# EAGLE board base_circuit (EAGLE 7.5.0)
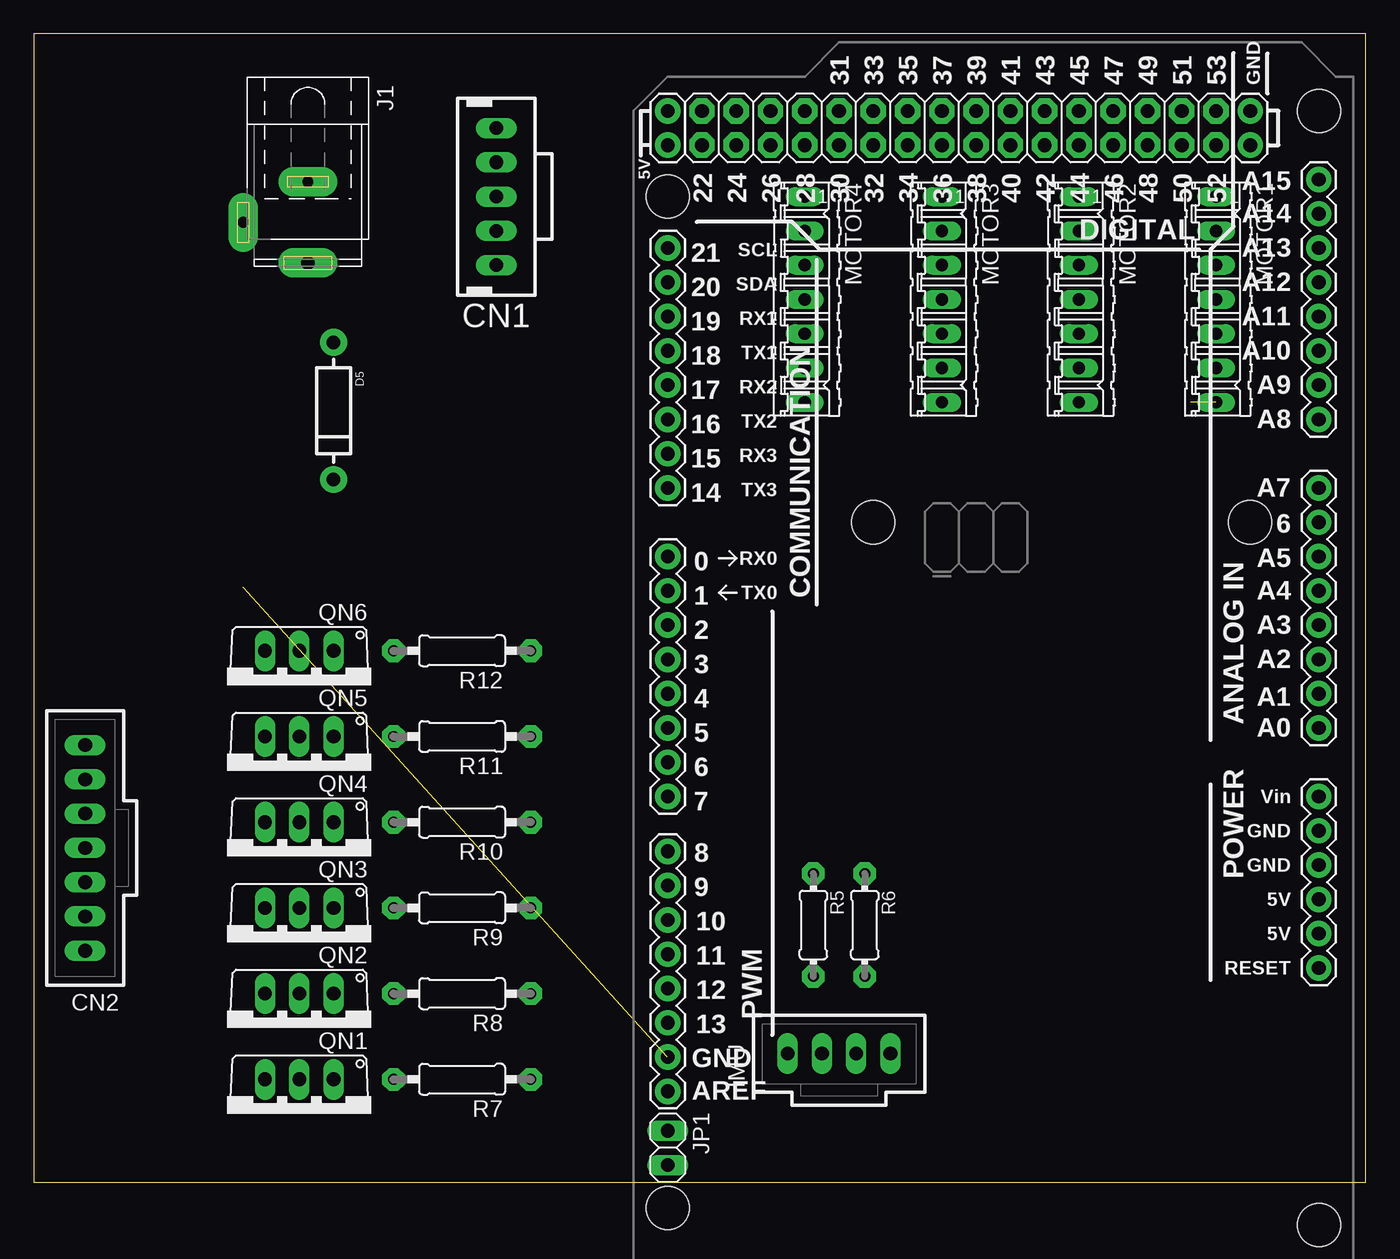
[diagram p0: board, top side]
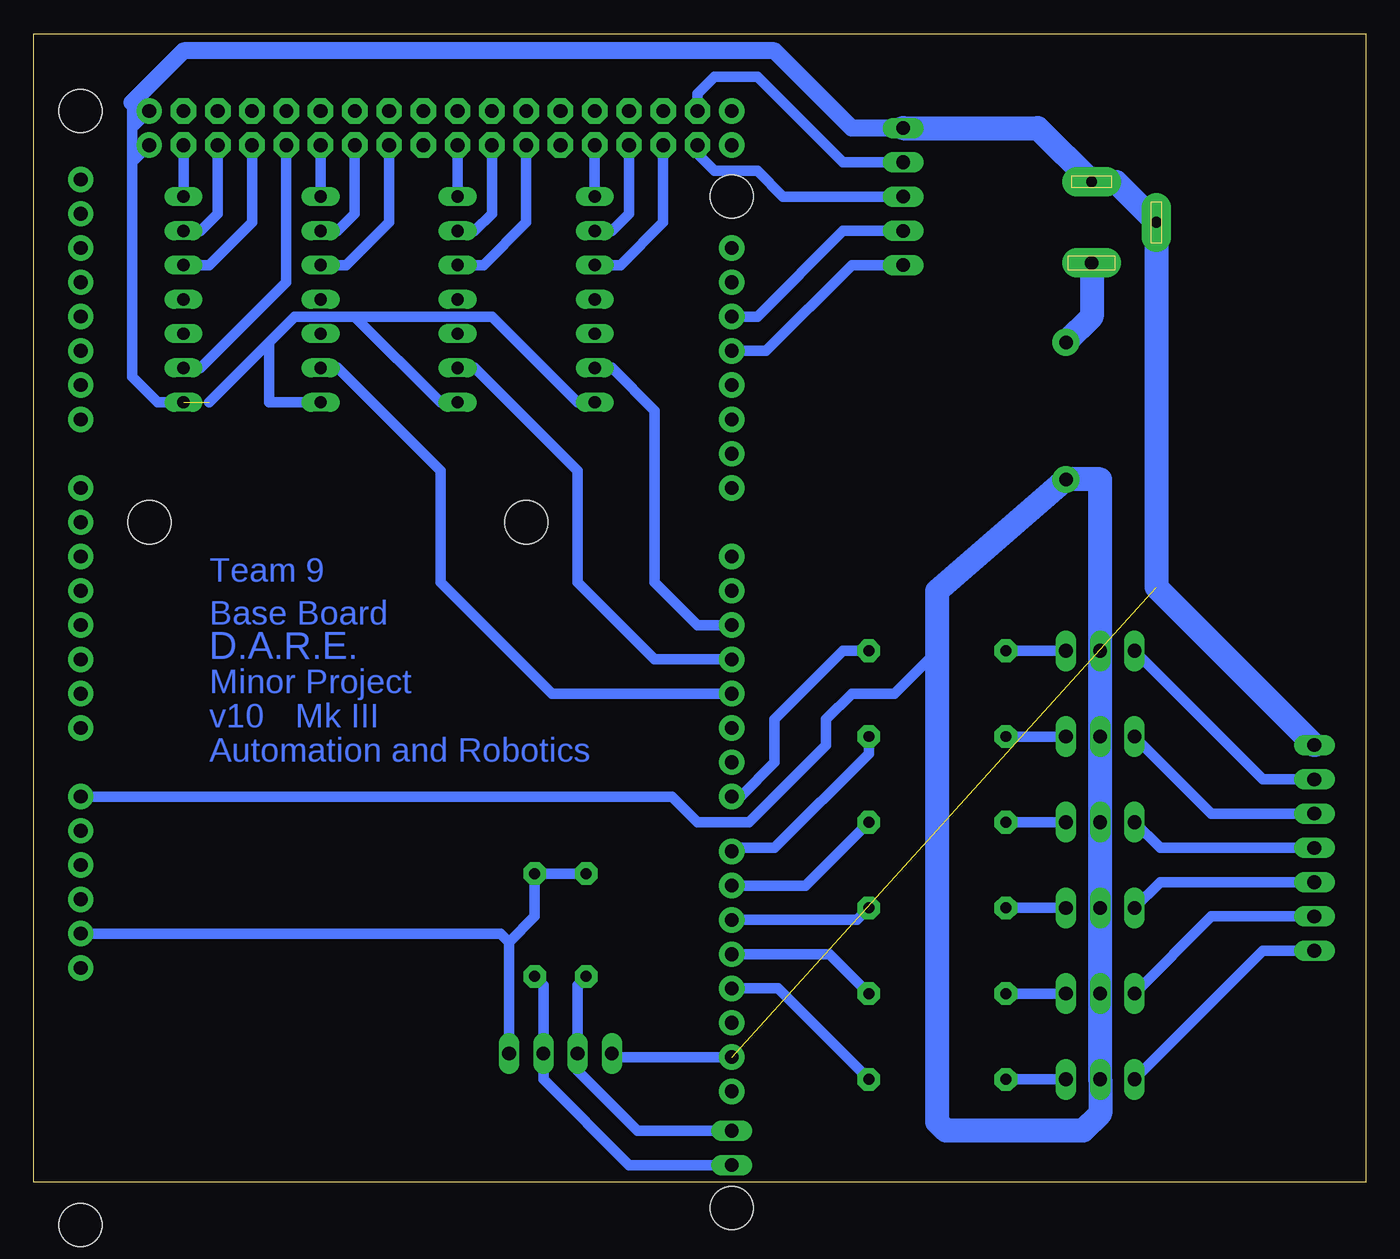
[diagram p1: board, bottom side, seen from below]

Size 98.73 x 85.08 mm. Coordinates in mm from the lower left corner, seen from the top.
Outline: 0,0 98.73,0 98.73,85.08 0,85.08 0,0
Copper layers (1*16): Top 0.035mm / dielectric 1.5mm / Bottom 0.035mm
Design rules "default": minimum track width 10mil, minimum drill 24mil, track to track 8mil, track to pad 8mil, pad to pad 8mil, via to via 8mil, smd to smd 8mil, copper to edge 40mil, drill to drill 8mil, minimum pad ring 10mil, minimum via ring 8mil, stop-mask expansion 4mil, vias tented up to drill 0mil, thermal gap 10mil
Net classes: 0 default: clearance 0.508 mm; 1 vcc24: width 1 mm, clearance 0.406 mm; 2 vcc5v: width 0.7 mm, clearance 0.406 mm

## Footprints (pad centres in the part's own frame; a part is rotated, then mirrored left to right if it is on the bottom)
MTE-100-5VL = drill 1.016 long: 1 -5.08,0; 2 -2.54,0; 3 0,0; 4 2.54,0; 5 5.08,0
70543-07 = drill 1.016 long: 1 -7.62,0; 2 -5.08,0; 3 -2.54,0; 4 0,0; 5 2.54,0; 6 5.08,0; 7 7.62,0
DIODE-1N4001 = drill 1 pad 1.981: A -5.08,0; C 5.08,0
70543-04 = drill 1.016 long: 1 -3.81,0; 2 -1.27,0; 3 1.27,0; 4 3.81,0
SPC4078 = drill 0.8 pad 2.184 long: 1 -3,0; 2 0,-4.8 | drill 1 pad 2.184 long: 3 3,0
1X02 = drill 1.016 long: 1 -1.27,0; 2 1.27,0
07P = drill 0.914 long: 1 -7.62,0; 2 -5.08,0; 3 -2.54,0; 4 0,0; 5 2.54,0; 6 5.08,0; 7 7.62,0
TO220AV = drill 1.016 long: B -2.54,-2.54; C 0,-2.54; E 2.54,-2.54
0204/7 = drill 0.813 pad 1.676 octagon: 1 -3.81,0; 2 3.81,0
0207/10 = drill 0.813 pad 1.676 octagon: 1 -5.08,0; 2 5.08,0
ARDUINO_MEGA = drill 1.016 pad 1.88: 0 63.5,50.8; 1 60.96,50.8; 2 58.42,50.8; 3 55.88,50.8; 3.3V 35.56,2.54; 4 53.34,50.8; 5 50.8,50.8; 5V@0 38.1,2.54; 5V@1 93.98,50.8; 5V@2 96.52,50.8; 6 48.26,50.8; 7 45.72,50.8; 8 41.656,50.8; 9 39.116,50.8; 10 36.576,50.8; 11 34.036,50.8; 12 31.496,50.8; 13 28.956,50.8; 14 68.58,50.8; 15 71.12,50.8; 16 73.66,50.8; 17 76.2,50.8; 18 78.74,50.8; 19 81.28,50.8; 20 83.82,50.8; 21 86.36,50.8; A0 50.8,2.54; A1 53.34,2.54; A2 55.88,2.54; A3 58.42,2.54; A4 60.96,2.54; A5 63.5,2.54; A6 66.04,2.54; A7 68.58,2.54; A8 73.66,2.54; A9 76.2,2.54; A10 78.74,2.54; A11 81.28,2.54; A12 83.82,2.54; A13 86.36,2.54; A14 88.9,2.54; A15 91.44,2.54; AREF 23.876,50.8; GND@0 40.64,2.54; GND@1 43.18,2.54; GND@2 93.98,7.62; GND@3 96.52,7.62; GND@4 26.416,50.8; RESET 33.02,2.54; VIN 45.72,2.54 | drill 1.016 pad 1.88 octagon: 22 93.98,48.26; 23 96.52,48.26; 24 93.98,45.72; 25 96.52,45.72; 26 93.98,43.18; 27 96.52,43.18; 28 93.98,40.64; 29 96.52,40.64; 30 93.98,38.1; 31 96.52,38.1; 32 93.98,35.56; 33 96.52,35.56; 34 93.98,33.02; 35 96.52,33.02; 36 93.98,30.48; 37 96.52,30.48; 38 93.98,27.94; 39 96.52,27.94; 40 93.98,25.4; 41 96.52,25.4; 42 93.98,22.86; 43 96.52,22.86; 44 93.98,20.32; 45 96.52,20.32; 46 93.98,17.78; 47 96.52,17.78; 48 93.98,15.24; 49 96.52,15.24; 50 93.98,12.7; 51 96.52,12.7; 52 93.98,10.16; 53 96.52,10.16 | hole 3.2: 15.24,50.8; 13.97,2.54; 66.04,35.56; 66.04,7.62; 90.17,50.8; 96.52,2.54

## Placement (x,y rotation side)
CN1  [MTE-100-5VL]  34.29,73.03 90 top
CN2  [70543-07]  3.81,24.77 90 top
D5  [DIODE-1N4001]  22.23,57.15 270 top
IMU  [70543-04]  59.69,9.53 0 top
J1  [SPC4078]  20.32,71.12 270 top
JP1  [1X02]  46.99,2.54 270 top
MOTOR1  m1  [07P]  87.63,65.41 270 top
MOTOR2  m2  [07P]  77.47,65.41 270 top
MOTOR3  m3  [07P]  67.31,65.41 270 top
MOTOR4  m4  [07P]  57.15,65.41 270 top
QN1  TIP127  [TO220AV]  19.68,5.08 180 top
QN2  TIP127  [TO220AV]  19.68,11.43 180 top
QN3  TIP127  [TO220AV]  19.68,17.78 180 top
QN4  TIP127  [TO220AV]  19.68,24.13 180 top
QN5  TIP127  [TO220AV]  19.68,30.48 180 top
QN6  TIP127  [TO220AV]  19.68,36.83 180 top
R5  2.2k  [0204/7]  57.78,19.05 270 top
R6  2.2k  [0204/7]  61.59,19.05 270 top
R7  [0207/10]  31.75,7.62 180 top
R8  [0207/10]  31.75,13.97 180 top
R9  [0207/10]  31.75,20.32 180 top
R10  [0207/10]  31.75,26.67 180 top
R11  [0207/10]  31.75,33.02 180 top
R12  [0207/10]  31.75,39.37 180 top
U1  ARDUINO-MEGAFULL  [ARDUINO_MEGA]  97.79,-17.14 90 top

## Library data of the parts
CN1 CN2 IMU = con-hdrs40
D5 = SparkFun-DiscreteSemi
J1 = con-jack; OC_FARNELL: unknown; OC_NEWARK: unknown
JP1 = pinhead
MOTOR1-MOTOR4 = con-amp-quick; OC_FARNELL: unknown; OC_NEWARK: unknown
QN1-QN6 = PAsystem
R5-R12 = adafruit
U1 = SparkFun-Boards

## Nets
BRAKE-M1: MOTOR1.1 U1.52
BRAKE-M2: MOTOR2.1 U1.44
BRAKE-M3: MOTOR3.1 U1.36
BRAKE-M4: MOTOR4.1 U1.28
DIR-M1: MOTOR1.3 U1.48
DIR-M2: MOTOR2.3 U1.40
DIR-M3: MOTOR3.3 U1.32
DIR-M4: MOTOR4.3 U1.24
DIS-M1: MOTOR1.2 U1.50
DIS-M2: MOTOR2.2 U1.42
DIS-M3: MOTOR3.2 U1.34
DIS-M4: MOTOR4.2 U1.26
FEEDBACK_IN1: CN1.3 U1.22
FEEDBACK_IN2: CN1.4 U1.23
FEEDBACK_INT1: CN1.1 U1.18
FEEDBACK_INT2: CN1.2 U1.19
GND: CN1.5 CN2.7 IMU.1 J1.1 J1.2 MOTOR1.7 MOTOR2.7 MOTOR3.7 MOTOR4.7 U1.GND@2 U1.GND@3 U1.GND@4
L1: R7.1 U1.12
L2: R8.1 U1.11
L3: R9.1 U1.10
L4: R10.1 U1.9
L5: R11.1 U1.8
L6: R12.1 U1.7
N$18: QN1.B R7.2
N$19: QN2.B R8.2
N$20: QN3.B R9.2
N$21: QN4.B R10.2
N$22: QN5.B R11.2
N$23: QN6.B R12.2
N$24: D5.A J1.3
N$27: CN2.1 QN1.E
N$28: CN2.2 QN2.E
N$29: CN2.3 QN3.E
N$30: CN2.4 QN4.E
N$31: CN2.5 QN5.E
N$32: CN2.6 QN6.E
SCL: IMU.3 JP1.2 R6.2
SDA: IMU.2 JP1.1 R5.2
SPEED-M1: MOTOR1.6 U1.46
SPEED-M2: MOTOR2.6 U1.4
SPEED-M3: MOTOR3.6 U1.3
SPEED-M4: MOTOR4.6 U1.2
VCC: IMU.4 R5.1 R6.1 U1.3.3V
VCC/2: D5.C QN1.C QN2.C QN3.C QN4.C QN5.C QN6.C U1.VIN

## Tracks (layer width: path | path; a pad name or v marks a point on that pad's centre or on a via)
BRAKE-M1
  Bottom 0.762: MOTOR1.1 U1.52
BRAKE-M2
  Bottom 0.762: MOTOR2.1 U1.44
BRAKE-M3
  Bottom 0.762: MOTOR3.1 U1.36
BRAKE-M4
  Bottom 0.762: MOTOR4.1 U1.28
DIR-M1
  Bottom 0.762: MOTOR1.3 85.72,67.94 82.55,71.12 U1.48
DIR-M2
  Bottom 0.762: MOTOR2.3 75.56,67.94 72.39,71.12 U1.40
DIR-M3
  Bottom 0.762: MOTOR3.3 65.41,67.94 62.23,71.12 U1.32
DIR-M4
  Bottom 0.762: MOTOR4.3 55.24,67.94 52.07,71.12 U1.24
DIS-M1
  Bottom 0.762: MOTOR1.2 86.36,70.48 85.09,71.75 U1.50
DIS-M2
  Bottom 0.762: MOTOR2.2 76.2,70.48 74.93,71.75 U1.42
DIS-M3
  Bottom 0.762: MOTOR3.2 66.04,70.48 64.77,71.75 U1.34
DIS-M4
  Bottom 0.762: MOTOR4.2 55.88,70.48 54.61,71.75 U1.26
FEEDBACK_IN1
  Bottom 0.762: CN1.3 43.18,73.03 45.09,74.93 48.26,74.93 49.53,76.2 U1.22
FEEDBACK_IN2
  Bottom 0.762: U1.23 49.53,80.64 48.26,81.92 45.09,81.92 38.73,75.56 CN1.4
FEEDBACK_INT1
  Bottom 0.762: CN1.1 38.1,67.94 44.45,61.59 U1.18
FEEDBACK_INT2
  Bottom 0.762: CN1.2 38.73,70.48 45.09,64.14 U1.19
GND  (2 unrouted)
  Bottom 0.762: MOTOR4.7 58.42,57.78 64.77,64.14 74.93,64.14 | 74.93,64.14 79.38,64.14 81.28,62.23 | 81.28,62.23 81.28,57.78 MOTOR2.7 | MOTOR3.7 68.58,57.78 74.93,64.14 | 85.72,57.78 81.28,62.23 | U1.GND@4 55.63,9.27 IMU.1 | MOTOR1.7 89.53,57.78 91.44,59.69 91.44,75.56 | 91.44,75.56 U1.GND@2 | U1.GND@3 91.44,78.11 | 91.44,78.11 91.44,75.56 | 91.44,80.01 91.44,78.11
  Bottom 1.27: CN1.5 38.1,78.11 43.81,83.82 87.63,83.82 91.44,80.01
  Bottom 1.778: CN1.5 24.3,78.11 J1.1 18.52,74.12 J1.2 15.52,44.09 CN2.7
L1
  Bottom 0.762: U1.12 43.56,14.35 R7.1
L2
  Bottom 0.762: U1.11 39.75,16.89 R8.1
L3
  Bottom 0.762: U1.10 37.72,19.43 R9.1
L4
  Bottom 0.762: U1.9 41.53,21.97 R10.1
L5
  Bottom 0.762: U1.8 46.74,24.77 43.81,24.77 36.83,31.75 R11.1
L6
  Bottom 0.762: U1.7 46.35,28.57 43.81,31.11 43.81,34.29 38.73,39.37 R12.1
N$18
  Bottom 0.762: QN1.B R7.2
N$19
  Bottom 0.762: QN2.B R8.2
N$20
  Bottom 0.762: QN3.B R9.2
N$21
  Bottom 0.762: QN4.B R10.2
N$22
  Bottom 0.762: QN5.B R11.2
N$23
  Bottom 0.762: QN6.B R12.2
N$24
  Bottom 1.778: J1.3 20.32,64.14 D5.A
N$27
  Bottom 0.762: CN2.1 7.62,17.14 QN1.E
N$28
  Bottom 0.762: CN2.2 11.43,19.68 QN2.E
N$29
  Bottom 0.762: CN2.3 15.24,22.23 QN3.E
N$30
  Bottom 0.762: CN2.4 15.24,24.77 QN4.E
N$31
  Bottom 0.762: CN2.5 11.43,27.3 QN5.E
N$32
  Bottom 0.762: QN6.E 7.62,29.84 CN2.6
SCL
  Bottom 0.762: JP1.2 54.61,1.27 60.96,7.62 IMU.3 60.96,14.61 R6.2
SDA
  Bottom 0.762: JP1.1 53.98,3.81 58.42,8.26 IMU.2 58.42,14.61 R5.2
SPEED-M1
  Bottom 0.762: MOTOR1.6 86.36,60.33 80.01,66.67 U1.46
SPEED-M2
  Bottom 0.762: MOTOR2.6 76.2,60.33 68.58,52.7 68.58,44.45 60.33,36.2 U1.4
SPEED-M3
  Bottom 0.762: MOTOR3.6 66.04,60.33 58.42,52.7 58.42,44.45 52.7,38.73 U1.3
SPEED-M4
  Bottom 0.762: MOTOR4.6 55.88,60.33 52.7,57.15 52.7,44.45 49.53,41.27 U1.2
VCC
  Bottom 0.762: R5.1 R6.1 61.59,19.68 63.5,17.78 | 63.5,17.78 IMU.4 | U1.3.3V 64.14,18.41 63.5,17.78
VCC/2
  Bottom 0.762: U1.VIN 51.44,28.57 49.53,26.67 45.72,26.67 40.01,32.38 40.01,34.29 38.1,36.2 34.92,36.2 31.75,39.37
  Bottom 1.778: QN2.C QN3.C QN4.C QN5.C QN6.C 19.68,52.07 D5.C 31.75,43.81 31.75,39.37 31.75,4.45 31.11,3.81 20.95,3.81 19.68,5.08 QN1.C QN2.C

## Text on the board
Bottom: Team 9 | Base Board | D.A.R.E. | Minor Project | Mk III | v10 | Automation and Robotics